# Altium PCB Arduino NG Ahuratus-PCB.PcbDoc (part 4 of 6)
Units mm, origin at the board's own origin, x right, y up, seen from the top; angles counter-clockwise.
Board outline 69 x 53.5 mm, 2 copper layers (Top Layer, Bottom Layer); 37 components, 49 nets, 193 pads, 40 vias.
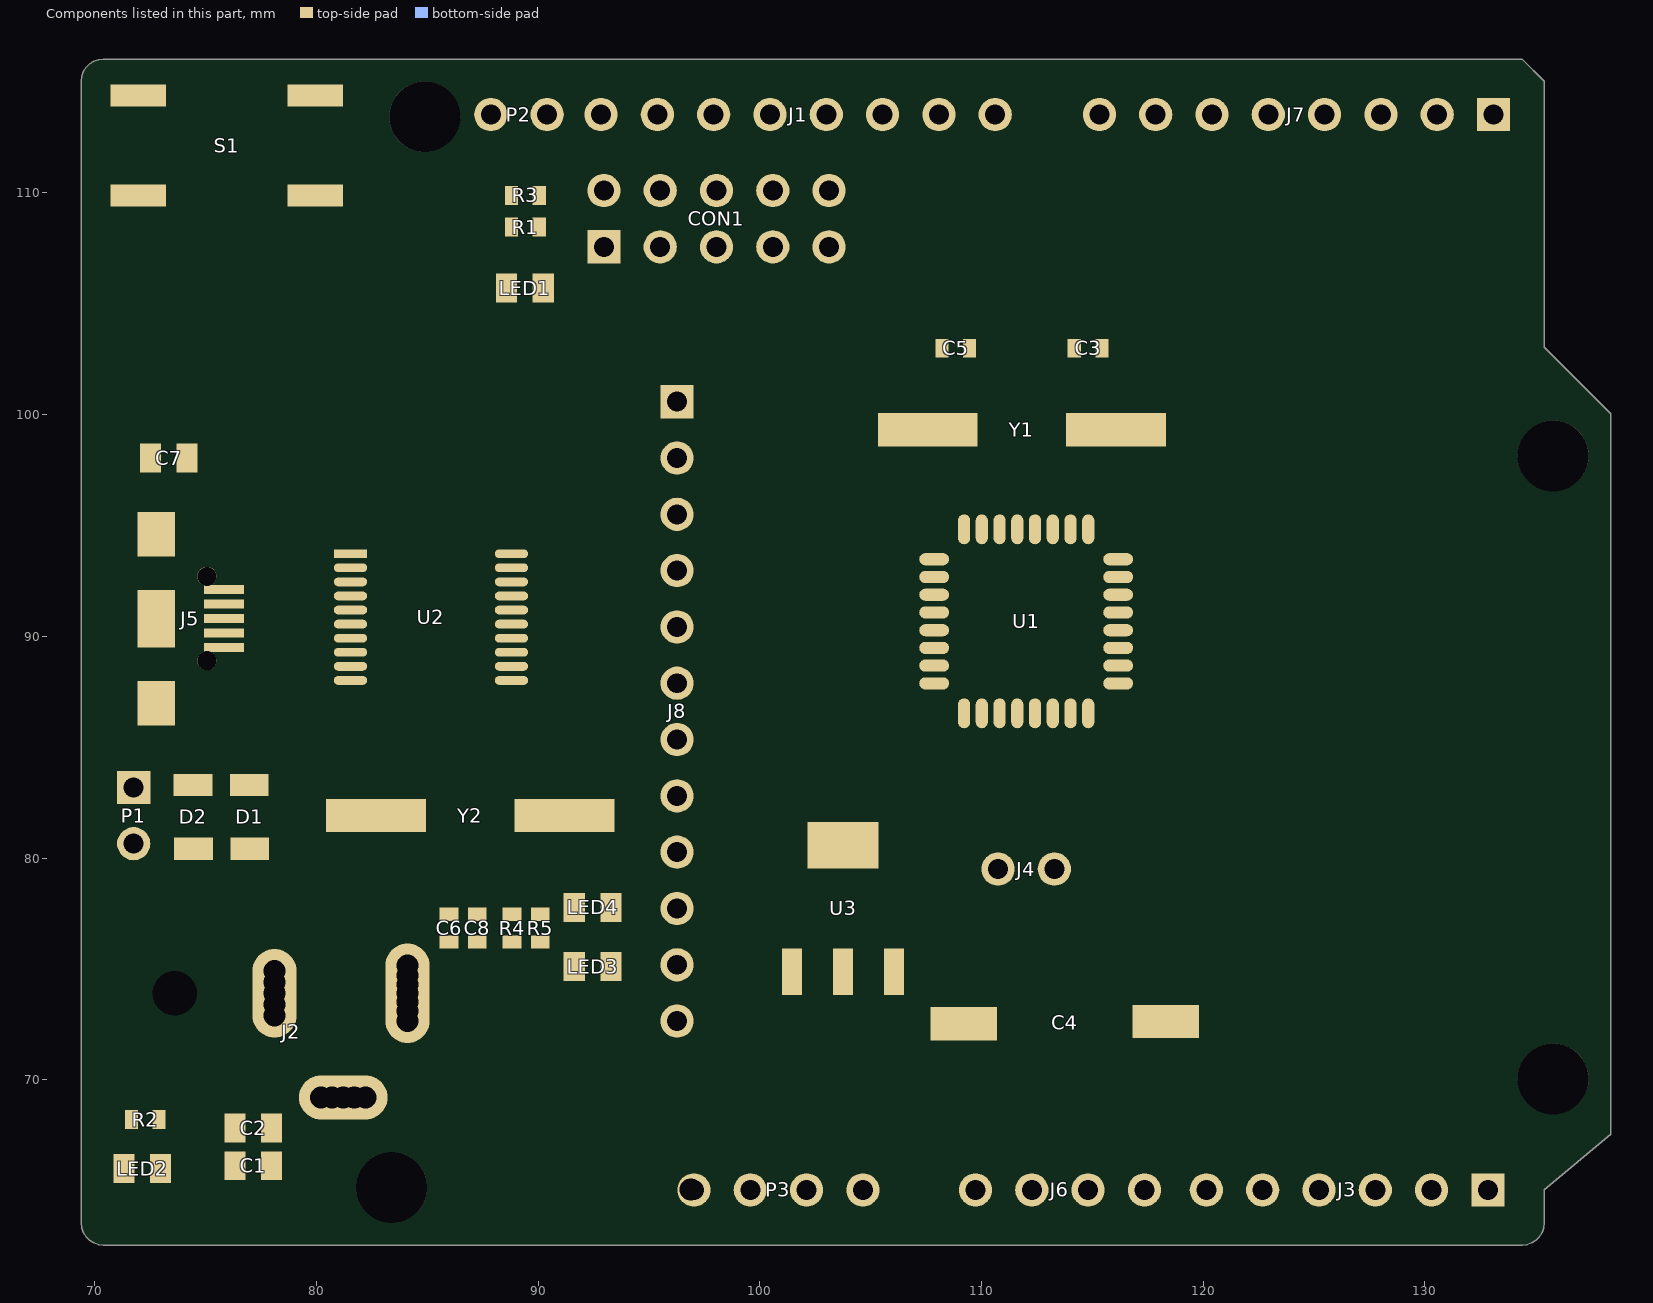
[diagram p4: the components of this part, seen from the top]

## Via types
v1: diameter 1.27, hole 0.711, Top Layer to Bottom Layer, 40 vias

## Nets (pads, with @x,y where several pads share a name; then routed paths per layer and width w, separated by ;. In a path a pad name is that pad's centre, name@x,y a point inside that pad or via, vN(x,y) a via of type N, cw(c..) or ccw(c..) an arc to the next point about the centre after c; other vN are vias at no path point) (continued)
copper on no net: (continued)
  Bottom Layer w0.025: 83.185,79.629 83.845,79.629 ; 83.185,80.594 83.414,80.594 ; 83.185,80.62 83.414,80.62 ; 83.185,80.645 83.388,80.645 ; 83.185,80.67 83.388,80.67 ; 83.185,81.077 83.388,81.077 ; 83.185,81.102 83.388,81.102 ; 83.185,81.128 83.414,81.128 ; 83.185,81.153 83.414,81.153 ; 83.185,82.118 83.566,82.118 ; 83.185,82.55 83.439,82.55 ; 83.185,82.575 83.439,82.575 ; 83.185,83.033 83.439,83.033 ; 83.185,84.404 83.566,84.404 ; 83.185,84.43 83.566,84.43 ; 83.185,84.455 83.566,84.455 ; 83.185,84.48 83.566,84.48 ; 83.185,84.506 83.566,84.506 ; 83.185,84.531 83.591,84.531 ; 83.185,84.557 83.591,84.557 ; 83.185,84.582 83.591,84.582 ; 83.185,85.827 83.414,85.827 ; 83.185,87.224 83.947,87.224 ; 83.185,87.249 83.845,87.249 ; 83.21,77.47 83.617,77.47 ; 83.21,80.518 83.439,80.518 ; 83.21,80.543 83.439,80.543 ; 83.21,80.569 83.414,80.569 ; 83.21,81.178 83.439,81.178 ; 83.21,81.204 83.464,81.204 ; 83.21,81.737 83.642,81.737 ; 83.21,82.525 83.464,82.525 ; 83.21,84.607 83.591,84.607 ; 83.21,84.633 83.591,84.633 ; 83.21,84.658 83.617,84.658 ; 83.21,84.684 83.617,84.684 ; 83.21,84.709 83.617,84.709 ; 83.21,84.734 83.617,84.734 ; 83.21,85.776 83.439,85.776 ; 83.21,85.801 83.439,85.801 ; 83.21,87.274 83.769,87.274 ; 83.236,79.07 83.769,79.07 ; 83.236,79.654 83.871,79.654 ; 83.236,80.467 83.464,80.467 ; 83.236,80.493 83.439,80.493 ; 83.236,81.229 83.464,81.229 ; 83.236,81.255 83.49,81.255 ; 83.236,81.763 83.718,81.763 ; 83.236,82.144 83.566,82.144 ; 83.236,82.499 83.464,82.499 ; 83.236,83.007 83.388,83.007 ; 83.236,84.76 83.642,84.76 ; 83.236,84.785 83.642,84.785 ; 83.236,84.811 83.642,84.811 ; 83.236,84.836 83.642,84.836 ; 83.236,84.861 83.668,84.861 ; 83.236,84.887 83.439,84.887 ; 83.236,85.725 83.464,85.725 ; 83.236,85.75 83.464,85.75 ; 83.236,87.3 83.668,87.3 ; 83.261,77.495 83.642,77.495 ; 83.261,80.34 83.464,80.34 ; 83.261,80.366 83.464,80.366 ; 83.261,80.391 83.464,80.391 ; 83.261,80.416 83.464,80.416 ; 83.261,80.442 83.464,80.442 ; 83.261,81.28 83.541,81.28 ; 83.261,82.448 83.49,82.448 ; 83.261,82.474 83.49,82.474 ; 83.261,84.912 83.668,84.912 ; 83.261,84.938 83.668,84.938 ; 83.261,84.963 83.693,84.963 ; 83.261,84.988 83.464,84.988 ; 83.261,85.014 83.464,85.014 ; 83.261,85.039 83.464,85.039 ; 83.261,85.674 83.49,85.674 ; 83.261,85.7 83.464,85.7 ; 83.261,86.436 85.395,86.436 ; 83.261,87.325 83.566,87.325 ; 83.287,79.045 83.769,79.045 ; 83.287,81.305 83.566,81.305 ; 83.287,81.788 83.795,81.788 ; 83.287,82.169 83.541,82.169 ; 83.287,82.398 83.515,82.398 ; 83.287,82.423 83.515,82.423 ; 83.287,85.065 83.49,85.065 ; 83.287,85.09 83.49,85.09 ; 83.287,85.115 83.49,85.115 ; 83.287,85.141 83.49,85.141 ; 83.287,85.166 83.515,85.166 ; 83.287,85.573 83.515,85.573 ; 83.287,85.598 83.49,85.598 ; 83.287,85.623 83.49,85.623 ; 83.287,85.649 83.49,85.649 ; 83.287,87.351 83.439,87.351 ; 83.312,77.521 83.668,77.521 ; 83.312,79.019 83.795,79.019 ; 83.312,79.68 83.871,79.68 ; 83.312,81.331 83.591,81.331 ; 83.312,81.356 83.642,81.356 ; 83.312,82.321 83.541,82.321 ; 83.312,82.347 83.515,82.347 ; 83.312,82.372 83.515,82.372 ; 83.312,85.192 83.515,85.192 ; 83.312,85.217 83.515,85.217 ; 83.312,85.242 83.515,85.242 ; 83.312,85.268 83.515,85.268 ; 83.312,85.293 83.515,85.293 ; 83.312,85.471 83.515,85.471 ; 83.312,85.496 83.515,85.496 ; 83.312,85.522 83.515,85.522 ; 83.312,85.547 83.515,85.547 ; 83.337,78.994 83.795,78.994 ; 83.337,81.382 83.718,81.382 ; 83.337,81.813 83.998,81.813 ; 83.337,82.194 83.541,82.194 ; 83.337,82.22 83.541,82.22 ; 83.337,82.245 83.541,82.245 ; 83.337,82.271 83.541,82.271 ; 83.337,82.296 83.541,82.296 ; 83.337,83.21 83.82,83.21 ; 83.337,85.319 83.515,85.319 ; 83.337,85.344 83.541,85.344 ; 83.337,85.369 83.541,85.369 ; 83.337,85.395 83.541,85.395 ; 83.337,85.42 83.541,85.42 ; 83.337,85.446 83.515,85.446 ; 83.363,77.546 83.693,77.546 ; 83.363,78.969 83.795,78.969 ; 83.363,79.705 83.896,79.705 ; 83.363,81.407 83.769,81.407 ; 83.363,81.839 85.014,81.839 ; 83.363,83.236 83.845,83.236 ; 83.388,78.943 83.795,78.943 ; 83.388,81.432 83.845,81.432 ; 83.388,83.261 83.845,83.261 ; 83.414,77.572 83.718,77.572 ; 83.414,78.918 83.795,78.918 ; 83.414,79.731 83.922,79.731 ; 83.414,83.287 83.871,83.287 ; 83.414,83.312 83.896,83.312 ; 83.414,86.411 85.42,86.411 ; 83.439,77.597 83.718,77.597 ; 83.439,78.892 83.795,78.892 ; 83.439,81.458 83.972,81.458 ; 83.439,81.864 84.988,81.864 ; 83.439,83.337 83.922,83.337 ; 83.464,77.622 83.744,77.622 ; 83.464,78.867 83.82,78.867 ; 83.464,79.756 83.947,79.756 ; 83.464,81.483 84.811,81.483 ; 83.464,82.931 84.353,82.931 ; 83.464,82.956 84.404,82.956 ; 83.464,82.982 84.455,82.982 ; 83.464,83.007 83.668,83.007 ; 83.464,83.033 83.668,83.033 ; 83.464,83.363 83.947,83.363 ; 83.464,84.887 83.668,84.887 ; 83.49,77.648 83.769,77.648 ; 83.49,78.816 83.845,78.816 ; 83.49,78.842 83.82,78.842 ; 83.49,81.89 84.938,81.89 ; 83.49,82.88 84.277,82.88 ; 83.49,82.906 84.303,82.906 ; 83.49,83.058 83.693,83.058 ; 83.49,83.388 83.947,83.388 ; 83.49,83.414 83.972,83.414 ; 83.49,84.988 83.693,84.988 ; 83.49,85.014 83.693,85.014 ; 83.49,85.039 83.718,85.039 ; 83.515,77.673 83.795,77.673 ; 83.515,78.765 84.328,78.765 ; 83.515,78.791 84.328,78.791 ; 83.515,79.781 83.972,79.781 ; 83.515,81.509 84.709,81.509 ; 83.515,82.855 84.226,82.855 ; 83.515,83.439 83.998,83.439 ; 83.515,85.065 83.718,85.065 ; 83.515,85.09 83.718,85.09 ; 83.515,85.115 83.744,85.115 ; 83.515,86.385 85.471,86.385 ; 83.541,77.699 83.795,77.699 ; 83.541,78.715 84.328,78.715 ; 83.541,78.74 84.328,78.74 ; 83.541,82.829 84.176,82.829 ; 83.541,83.464 84.023,83.464 ; 83.541,85.141 83.744,85.141 ; 83.541,85.166 83.769,85.166 ; 83.541,85.192 83.769,85.192 ; 83.566,77.724 83.82,77.724 ; 83.566,78.664 84.328,78.664 ; 83.566,78.689 84.328,78.689 ; 83.566,79.807 83.972,79.807 ; 83.566,80.797 84.023,80.797 ; 83.566,80.823 84.049,80.823 ; 83.566,80.848 84.074,80.848 ; 83.566,80.874 84.099,80.874 ; 83.566,80.899 83.795,80.899 ; 83.566,80.924 83.795,80.924 ; 83.566,80.95 83.769,80.95 ; 83.566,81.534 84.658,81.534 ; 83.566,81.915 84.861,81.915 ; 83.566,83.49 84.023,83.49 ; 83.566,83.515 84.049,83.515 ; 83.566,85.217 83.795,85.217 ; 83.566,85.242 83.795,85.242 ; 83.591,77.749 83.845,77.749 ; 83.591,78.562 84.328,78.562 ; 83.591,78.588 84.328,78.588 ; 83.591,78.613 84.328,78.613 ; 83.591,78.638 84.328,78.638 ; 83.591,80.67 83.795,80.67 ; 83.591,80.696 83.795,80.696 ; 83.591,80.721 83.769,80.721 ; 83.591,80.747 83.769,80.747 ; 83.591,80.772 83.998,80.772 ; 83.591,80.975 83.769,80.975 ; 83.591,81.001 83.769,81.001 ; 83.591,81.026 83.795,81.026 ; 83.591,81.051 83.795,81.051 ; 83.591,81.077 83.795,81.077 ; 83.591,83.541 84.074,83.541 ; 83.591,85.268 83.82,85.268 ; 83.591,85.293 83.82,85.293 ; 83.617,77.775 83.845,77.775 ; 83.617,78.511 83.744,78.511 ; 83.617,78.537 84.328,78.537 ; 83.617,79.832 83.998,79.832 ; 83.617,80.62 84.074,80.62 ; 83.617,80.645 83.82,80.645 ; 83.617,81.102 83.82,81.102 ; 83.617,81.128 84.074,81.128 ; 83.617,82.575 85.344,82.575 ; 83.617,82.601 85.192,82.601 ; 83.617,82.626 85.217,82.626 ; 83.617,82.652 85.344,82.652 ; 83.617,82.677 83.871,82.677 ; 83.617,82.702 83.922,82.702 ; 83.617,82.804 84.125,82.804 ; 83.617,83.566 84.099,83.566 ; 83.617,85.319 83.845,85.319 ; 83.617,85.344 83.871,85.344 ; 83.617,86.36 85.496,86.36 ; 83.642,77.8 83.871,77.8 ; 83.642,77.826 83.896,77.826 ; 83.642,80.569 84.049,80.569 ; 83.642,80.594 84.074,80.594 ; 83.642,81.153 84.074,81.153 ; 83.642,81.178 84.049,81.178 ; 83.642,81.559 84.582,81.559 ; 83.642,81.94 84.76,81.94 ; 83.642,82.55 85.42,82.55 ; 83.642,82.728 83.972,82.728 ; 83.642,82.753 84.023,82.753 ; 83.642,83.591 84.099,83.591 ; 83.642,83.617 84.125,83.617 ; 83.642,85.369 83.871,85.369 ; 83.642,85.395 83.896,85.395 ; 83.668,77.851 83.896,77.851 ; 83.668,79.858 84.023,79.858 ; 83.668,80.543 84.049,80.543 ; 83.668,81.204 84.023,81.204 ; 83.668,82.525 85.471,82.525 ; 83.668,82.779 84.074,82.779 ; 83.668,83.642 84.15,83.642 ; 83.668,85.42 83.922,85.42 ; 83.693,77.876 83.922,77.876 ; 83.693,77.902 83.922,77.902 ; 83.693,80.518 84.023,80.518 ; 83.693,81.585 84.506,81.585 ; 83.693,82.194 84.633,82.194 ; 83.693,82.22 84.48,82.22 ; 83.693,82.245 83.896,82.245 ; 83.693,82.271 83.922,82.271 ; 83.693,82.296 83.972,82.296 ; 83.693,82.499 85.522,82.499 ; 83.693,83.668 84.15,83.668 ; 83.693,85.446 83.947,85.446 ; 83.693,85.471 83.972,85.471 ; 83.718,77.927 83.922,77.927 ; 83.718,77.953 83.947,77.953 ; 83.718,77.978 83.947,77.978 ; 83.718,79.883 84.023,79.883 ; 83.718,81.229 83.998,81.229 ; 83.718,82.144 84.836,82.144 ; 83.718,82.169 84.76,82.169 ; 83.718,82.321 84.074,82.321 ; 83.718,82.347 84.252,82.347 ; 83.718,83.007 84.506,83.007 ; 83.718,83.693 84.176,83.693 ; 83.718,83.718 84.201,83.718 ; 83.718,85.496 83.998,85.496 ; 83.718,86.335 85.522,86.335 ; 83.744,78.003 83.947,78.003 ; 83.744,78.029 83.972,78.029 ; 83.744,78.054 83.972,78.054 ; 83.744,79.908 84.049,79.908 ; 83.744,80.493 83.972,80.493 ; 83.744,81.966 84.684,81.966 ; 83.744,82.118 84.912,82.118 ; 83.744,82.372 84.404,82.372 ; 83.744,83.744 84.226,83.744 ; 83.744,85.522 84.049,85.522 ; 83.769,78.08 83.972,78.08 ; 83.769,78.105 83.972,78.105 ; 83.769,78.13 83.972,78.13 ; 83.769,81.61 84.404,81.61 ; 83.769,82.093 85.014,82.093 ; 83.769,82.398 84.658,82.398 ; 83.769,83.033 84.531,83.033 ; 83.769,83.769 84.226,83.769 ; 83.769,85.547 84.125,85.547 ; 83.795,78.156 83.998,78.156 ; 83.795,78.181 83.998,78.181 ; 83.795,78.207 83.998,78.207 ; 83.795,78.232 83.998,78.232 ; 83.795,78.257 83.998,78.257 ; 83.795,78.435 84.252,78.435 ; 83.795,78.461 84.252,78.461 ; 83.795,78.486 84.328,78.486 ; 83.795,78.511 84.328,78.511 ; 83.795,79.934 84.074,79.934 ; 83.795,81.255 83.922,81.255 ; 83.795,82.423 84.912,82.423 ; 83.795,83.795 84.252,83.795 ; 83.795,83.82 84.277,83.82 ; 83.795,85.573 84.607,85.573 ; 83.795,85.598 84.582,85.598 ; 83.795,86.309 85.547,86.309 ; 83.82,78.283 83.998,78.283 ; 83.82,78.308 84.023,78.308 ; 83.82,78.334 84.023,78.334 ; 83.82,78.359 84.023,78.359 ; 83.82,78.384 84.277,78.384 ; 83.82,78.41 84.252,78.41 ; 83.82,79.959 84.074,79.959 ; 83.82,80.747 83.947,80.747 ; 83.82,82.067 85.141,82.067 ; 83.82,82.474 83.947,82.474 ; 83.82,83.058 84.582,83.058 ; 83.82,83.845 84.277,83.845 ; 83.845,83.083 84.633,83.083 ; 83.845,83.871 84.303,83.871 ; 83.845,85.623 84.557,85.623 ; 83.871,78.816 84.328,78.816 ; 83.871,79.985 84.099,79.985 ; 83.871,82.448 85.573,82.448 ; 83.871,83.896 84.328,83.896 ; 83.871,85.649 84.531,85.649 ; 83.871,86.284 85.573,86.284 ; 83.896,78.842 84.328,78.842 ; 83.896,78.867 84.328,78.867 ; 83.896,80.01 84.099,80.01 ; 83.896,80.645 84.099,80.645 ; 83.896,80.899 84.099,80.899 ; 83.896,81.102 84.099,81.102 ; 83.896,81.636 84.252,81.636 ; 83.896,83.109 84.658,83.109 ; 83.896,83.922 84.353,83.922 ; 83.896,83.947 84.353,83.947 ; 83.922,78.892 84.328,78.892 ; 83.922,78.918 84.328,78.918 ; 83.922,80.035 84.125,80.035 ; 83.922,80.67 84.099,80.67 ; 83.922,80.696 84.023,80.696 ; 83.922,80.924 84.099,80.924 ; 83.922,80.95 84.099,80.95 ; 83.922,80.975 84.125,80.975 ; 83.922,81.001 84.125,81.001 ; 83.922,81.026 84.125,81.026 ; 83.922,81.051 84.099,81.051 ; 83.922,81.077 84.099,81.077 ; 83.922,81.991 84.531,81.991 ; 83.922,83.972 84.379,83.972 ; 83.922,85.674 84.48,85.674 ; 83.947,78.943 84.328,78.943 ; 83.947,78.969 84.328,78.969 ; 83.947,80.061 84.125,80.061 ; 83.947,83.134 84.709,83.134 ; 83.947,83.998 84.404,83.998 ; 83.947,86.258 85.598,86.258 ; 83.972,78.994 84.328,78.994 ; 83.972,79.019 84.328,79.019 ; 83.972,79.045 84.328,79.045 ; 83.972,80.086 84.15,80.086 ; 83.972,82.474 85.547,82.474 ; 83.972,84.023 84.404,84.023 ; 83.972,84.049 84.43,84.049 ; 83.972,85.7 84.43,85.7 ; 83.998,79.07 84.353,79.07 ; 83.998,79.096 84.353,79.096 ; 83.998,79.121 84.353,79.121 ; 83.998,79.146 84.353,79.146 ; 83.998,80.112 84.15,80.112 ; 83.998,83.16 84.734,83.16 ; 83.998,84.074 84.455,84.074 ; 84.023,79.172 84.379,79.172 ; 84.023,79.197 84.379,79.197 ; 84.023,79.223 84.379,79.223 ; 84.023,79.248 84.404,79.248 ; 84.023,80.137 84.15,80.137 ; 84.023,83.185 84.785,83.185 ; 84.023,84.099 84.48,84.099 ; 84.023,84.125 84.506,84.125 ; 84.023,86.233 85.623,86.233 ; 84.049,78.359 84.277,78.359 ; 84.049,79.273 84.404,79.273 ; 84.049,79.299 84.404,79.299 ; 84.049,79.324 84.43,79.324 ; 84.049,80.162 84.125,80.162 ; 84.049,84.15 84.506,84.15 ; 84.049,85.725 84.353,85.725 ; 84.074,78.334 84.303,78.334 ; 84.074,79.35 84.455,79.35 ; 84.074,79.375 84.455,79.375 ; 84.074,83.21 84.811,83.21 ; 84.074,84.176 84.531,84.176 ; 84.074,86.208 85.649,86.208 ; 84.099,78.283 84.328,78.283 ; 84.099,78.308 84.303,78.308 ; 84.099,79.4 84.455,79.4 ; 84.099,79.426 84.48,79.426 ; 84.099,79.451 84.531,79.451 ; 84.099,82.677 85.42,82.677 ; 84.099,84.201 84.557,84.201 ; 84.099,84.226 84.582,84.226 ; 84.125,78.257 84.353,78.257 ; 84.125,79.477 84.531,79.477 ; 84.125,79.502 84.557,79.502 ; 84.125,83.236 84.861,83.236 ; 84.125,84.252 84.607,84.252 ; 84.125,86.182 85.674,86.182 ; 84.15,78.207 84.379,78.207 ; 84.15,78.232 84.353,78.232 ; 84.15,79.527 84.607,79.527 ; 84.15,81.458 85.166,81.458 ; 84.15,84.277 84.633,84.277 ; 84.15,84.303 84.658,84.303 ; 84.176,78.181 84.404,78.181 ; 84.176,79.553 84.633,79.553 ; 84.176,79.578 84.658,79.578 ; 84.176,83.261 84.912,83.261 ; 84.176,84.328 84.684,84.328 ; 84.201,78.156 84.43,78.156 ; 84.201,79.604 84.709,79.604 ; 84.201,84.353 84.709,84.353 ; 84.201,84.379 84.734,84.379 ; 84.201,86.157 85.7,86.157 ; 84.226,78.105 84.48,78.105 ; 84.226,78.13 84.455,78.13 ; 84.226,79.629 84.734,79.629 ; 84.226,83.287 84.938,83.287 ; 84.226,84.404 84.76,84.404 ; 84.252,78.08 84.506,78.08 ; 84.252,79.654 84.785,79.654 ; 84.252,84.43 84.811,84.43 ; 84.252,86.131 85.725,86.131 ; 84.277,78.054 84.557,78.054 ; 84.277,79.68 84.861,79.68 ; 84.277,80.493 84.455,80.493 ; 84.277,80.518 84.455,80.518 ; 84.277,80.543 84.455,80.543 ; 84.277,80.569 84.455,80.569 ; 84.277,80.594 84.455,80.594 ; 84.277,80.62 84.455,80.62 ; 84.277,80.645 84.455,80.645 ; 84.277,80.67 84.455,80.67 ; 84.277,80.696 84.455,80.696 ; 84.277,80.721 84.455,80.721 ; 84.277,80.747 84.455,80.747 ; 84.277,80.772 84.455,80.772 ; 84.277,80.797 84.455,80.797 ; 84.277,80.823 84.455,80.823 ; 84.277,80.848 84.455,80.848 ; 84.277,80.874 84.455,80.874 ; 84.277,80.899 84.455,80.899 ; 84.277,80.924 84.455,80.924 ; 84.277,80.95 84.455,80.95 ; 84.277,80.975 84.455,80.975 ; 84.277,81.001 84.633,81.001 ; 84.277,81.026 84.633,81.026 ; 84.277,81.051 84.633,81.051 ; 84.277,81.077 84.607,81.077 ; 84.277,81.102 84.582,81.102 ; 84.277,81.128 84.531,81.128 ; 84.277,81.153 84.506,81.153 ; 84.277,81.178 84.48,81.178 ; 84.277,81.204 84.455,81.204 ; 84.277,81.229 84.43,81.229 ; 84.277,81.255 84.43,81.255 ; 84.277,83.312 84.988,83.312 ; 84.277,84.455 84.836,84.455 ; 84.277,84.48 84.506,84.48 ; 84.303,78.029 84.582,78.029 ; 84.303,79.705 84.938,79.705 ; 84.303,84.506 84.531,84.506 ; 84.303,84.531 84.557,84.531 ; 84.303,85.547 84.633,85.547 ; 84.303,86.106 85.75,86.106 ; 84.328,78.003 84.633,78.003 ; 84.328,79.731 86.081,79.731 ; 84.328,81.432 85.166,81.432 ; 84.328,82.702 85.496,82.702 ; 84.328,83.337 85.039,83.337 ; 84.328,84.557 84.557,84.557 ; 84.353,77.978 84.684,77.978 ; 84.353,79.756 86.081,79.756 ; 84.353,83.363 85.09,83.363 ; 84.353,84.582 84.582,84.582 ; 84.353,84.607 84.582,84.607 ; 84.353,85.522 84.658,85.522 ; 84.353,86.081 85.776,86.081 ; 84.379,77.953 84.734,77.953 ; 84.379,79.781 86.055,79.781 ; 84.379,84.633 84.607,84.633 ; 84.379,84.658 84.607,84.658 ; 84.404,79.807 86.03,79.807 ; 84.404,83.388 85.141,83.388 ; 84.404,84.684 84.633,84.684 ; 84.404,84.709 84.633,84.709 ; 84.404,85.496 84.658,85.496 ; 84.404,86.055 85.776,86.055 ; 84.43,77.927 84.811,77.927 ; 84.43,79.832 86.004,79.832 ; 84.43,81.407 85.141,81.407 ; 84.43,84.734 84.658,84.734 ; 84.43,84.76 84.658,84.76 ; 84.43,85.471 84.684,85.471 ; 84.43,86.03 85.801,86.03 ; 84.455,77.902 84.887,77.902 ; 84.455,79.858 86.004,79.858 ; 84.455,81.813 85.065,81.813 ; 84.455,82.042 85.598,82.042 ; 84.455,83.414 85.217,83.414 ; 84.455,84.785 84.684,84.785 ; 84.455,84.811 84.684,84.811 ; 84.455,85.446 84.684,85.446 ; 84.48,79.883 85.979,79.883 ; 84.48,80.975 84.633,80.975 ; 84.48,84.836 84.684,84.836 ; 84.48,84.861 84.709,84.861 ; 84.48,85.395 84.709,85.395 ; 84.48,85.42 84.684,85.42 ; 84.48,86.004 85.827,86.004 ; 84.506,77.876 85.09,77.876 ; 84.506,79.908 85.954,79.908 ; 84.506,81.382 85.141,81.382 ; 84.506,83.439 85.7,83.439 ; 84.506,84.887 84.709,84.887 ; 84.506,84.912 84.709,84.912 ; 84.506,84.938 84.734,84.938 ; 84.506,85.319 84.734,85.319 ; 84.506,85.344 84.709,85.344 ; 84.506,85.369 84.709,85.369 ; 84.531,77.851 85.674,77.851 ; 84.531,79.934 85.954,79.934 ; 84.531,80.95 84.633,80.95 ; 84.531,82.728 85.547,82.728 ; 84.531,83.464 85.674,83.464 ; 84.531,84.48 84.887,84.48 ; 84.531,84.963 84.734,84.963 ; 84.531,84.988 84.734,84.988 ; 84.531,85.014 84.734,85.014 ; 84.531,85.039 84.734,85.039 ; 84.531,85.065 84.734,85.065 ; 84.531,85.217 84.734,85.217 ; 84.531,85.242 84.734,85.242 ; 84.531,85.268 84.734,85.268 ; 84.531,85.293 84.734,85.293 ; 84.531,85.979 85.852,85.979 ; 84.557,85.09 84.734,85.09 ; 84.557,85.115 84.734,85.115 ; 84.557,85.141 84.734,85.141 ; 84.557,85.166 84.734,85.166 ; 84.557,85.192 84.734,85.192 ; 84.557,85.954 85.877,85.954 ; 84.582,77.826 85.649,77.826 ; 84.582,79.959 85.928,79.959 ; 84.582,80.924 84.633,80.924 ; 84.582,81.356 85.115,81.356 ; 84.582,83.49 85.649,83.49 ; 84.582,84.506 84.963,84.506 ; 84.607,79.985 85.928,79.985 ; 84.607,81.788 85.09,81.788 ; 84.607,82.017 85.573,82.017 ; 84.607,84.531 85.42,84.531 ; 84.607,85.928 85.877,85.928 ; 84.633,77.8 85.598,77.8 ; 84.633,80.01 85.573,80.01 ; 84.633,83.515 85.623,83.515 ; 84.633,84.557 85.395,84.557 ; 84.633,85.903 85.877,85.903 ; 84.658,80.035 85.547,80.035 ; 84.658,81.331 85.065,81.331 ; 84.658,83.541 85.573,83.541 ; 84.684,77.775 85.547,77.775 ; 84.684,80.061 85.522,80.061 ; 84.684,81.991 85.547,81.991 ; 84.684,84.582 85.369,84.582 ; 84.684,85.877 85.877,85.877 ; 84.709,80.086 85.496,80.086 ; 84.709,81.763 85.115,81.763 ; 84.709,83.566 85.547,83.566 ; 84.709,84.607 85.319,84.607 ; 84.709,85.852 85.852,85.852 ; 84.734,80.112 85.496,80.112 ; 84.734,81.305 84.988,81.305 ; 84.734,85.827 85.852,85.827 ; 84.76,77.749 85.471,77.749 ; 84.76,82.753 85.573,82.753 ; 84.76,83.591 85.09,83.591 ; 84.76,84.633 85.293,84.633 ; 84.785,80.137 85.471,80.137 ; 84.785,81.737 85.115,81.737 ; 84.785,81.966 85.522,81.966 ; 84.785,83.617 85.141,83.617 ; 84.785,85.801 85.827,85.801 ; 84.811,80.162 85.471,80.162 ; 84.811,84.658 85.242,84.658 ; 84.811,85.776 85.827,85.776 ; 84.836,77.724 85.395,77.724 ; 84.836,80.188 85.446,80.188 ; 84.836,83.642 85.166,83.642 ; 84.836,85.75 85.801,85.75 ; 84.836,86.462 85.369,86.462 ; 84.861,80.213 85.446,80.213 ; 84.861,80.239 85.446,80.239 ; 84.861,81.712 85.141,81.712 ; 84.861,81.94 85.471,81.94 ; 84.861,83.668 85.192,83.668 ; 84.861,85.725 85.801,85.725 ; 84.887,80.264 85.446,80.264 ; 84.912,80.289 85.446,80.289 ; 84.912,81.686 85.166,81.686 ; 84.912,83.693 85.242,83.693 ; 84.912,84.684 85.166,84.684 ; 84.912,85.7 85.801,85.7 ; 84.912,86.487 85.344,86.487 ; 84.938,80.315 85.446,80.315 ; 84.938,80.34 85.42,80.34 ; 84.938,81.483 85.192,81.483 ; 84.938,81.661 85.166,81.661 ; 84.938,83.718 85.268,83.718 ; 84.938,85.674 85.801,85.674 ; 84.938,86.512 85.293,86.512 ; 84.963,77.699 85.242,77.699 ; 84.963,80.366 85.42,80.366 ; 84.963,81.61 85.166,81.61 ; 84.963,81.636 85.166,81.636 ; 84.963,81.915 85.395,81.915 ; 84.963,85.649 85.776,85.649 ; 84.988,80.391 85.42,80.391 ; 84.988,80.416 85.42,80.416 ; 84.988,81.509 85.192,81.509 ; 84.988,81.534 85.192,81.534 ; 84.988,81.559 85.192,81.559 ; 84.988,81.585 85.192,81.585 ; 84.988,82.779 85.598,82.779 ; 84.988,83.744 85.293,83.744 ; 84.988,85.623 85.776,85.623 ; 84.988,86.538 85.268,86.538 ; 85.014,80.442 85.42,80.442 ; 85.014,80.467 85.42,80.467 ; 85.014,83.769 85.319,83.769 ; 85.014,85.598 85.776,85.598 ; 85.014,86.563 85.242,86.563 ; 85.039,80.493 85.42,80.493 ; 85.039,83.795 85.344,83.795 ; 85.039,85.573 85.776,85.573 ; 85.065,80.518 85.42,80.518 ; 85.065,80.543 85.42,80.543 ; 85.065,81.89 85.319,81.89 ; 85.065,83.82 85.344,83.82 ; 85.065,85.547 85.776,85.547 ; 85.065,86.589 85.192,86.589 ; 85.09,80.569 85.42,80.569 ; 85.09,80.594 85.42,80.594 ; 85.09,84.506 85.446,84.506 ; 85.09,85.522 85.776,85.522 ; 85.09,86.614 85.166,86.614 ; 85.115,80.62 85.42,80.62 ; 85.115,80.645 85.42,80.645 ; 85.115,83.845 85.369,83.845 ; 85.115,85.496 85.776,85.496 ; 85.141,77.876 85.725,77.876 ; 85.141,80.67 85.42,80.67 ; 85.141,83.871 85.395,83.871 ; 85.141,85.471 85.801,85.471 ; 85.166,80.696 85.42,80.696 ; 85.166,80.721 85.42,80.721 ; 85.166,82.423 85.573,82.423 ; 85.166,82.804 85.649,82.804 ; 85.166,83.591 85.471,83.591 ; 85.166,83.896 85.395,83.896 ; 85.166,84.48 85.446,84.48 ; 85.166,85.42 85.852,85.42 ; 85.166,85.446 85.827,85.446 ; 85.192,80.747 85.42,80.747 ; 85.192,80.772 85.42,80.772 ; 85.192,83.922 85.42,83.922 ; 85.192,83.947 85.446,83.947 ; 85.192,84.455 85.471,84.455 ; 85.192,85.395 85.852,85.395 ; 85.217,79.705 86.106,79.705 ; 85.217,80.797 85.42,80.797 ; 85.217,83.972 85.446,83.972 ; 85.217,85.369 85.877,85.369 ; 85.242,80.823 85.42,80.823 ; 85.242,80.848 85.42,80.848 ; 85.242,82.067 85.623,82.067 ; 85.242,83.998 85.446,83.998 ; 85.242,84.023 85.471,84.023 ; 85.242,84.43 85.471,84.43 ; 85.242,85.344 85.903,85.344 ; 85.268,80.874 85.42,80.874 ; 85.268,80.899 85.42,80.899 ; 85.268,82.829 85.674,82.829 ; 85.268,84.049 85.471,84.049 ; 85.268,84.074 85.496,84.074 ; 85.268,84.099 85.496,84.099 ; 85.268,84.379 85.496,84.379 ; 85.268,84.404 85.496,84.404 ; 85.268,85.319 85.928,85.319 ; 85.293,80.924 85.42,80.924 ; 85.293,82.398 85.598,82.398 ; 85.293,84.125 85.496,84.125 ; 85.293,84.15 85.496,84.15 ; 85.293,84.176 85.496,84.176 ; 85.293,84.201 85.496,84.201 ; 85.293,84.303 85.496,84.303 ; 85.293,84.328 85.496,84.328 ; 85.293,84.353 85.496,84.353 ; 85.293,85.268 85.954,85.268 ; 85.293,85.293 85.928,85.293 ; 85.319,79.68 86.131,79.68 ; 85.319,80.95 85.42,80.95 ; 85.319,82.093 85.623,82.093 ; 85.319,84.226 85.522,84.226 ; 85.319,84.252 85.522,84.252 ; 85.319,84.277 85.522,84.277 ; 85.319,85.242 85.979,85.242 ; 85.344,77.902 85.75,77.902 ; 85.344,80.975 85.42,80.975 ; 85.344,82.372 85.623,82.372 ; 85.344,85.217 85.979,85.217 ; 85.369,79.654 86.157,79.654 ; 85.369,82.855 85.7,82.855 ; 85.369,83.414 85.725,83.414 ; 85.369,85.192 86.004,85.192 ; 85.395,82.118 85.649,82.118 ; 85.395,82.347 85.623,82.347 ; 85.395,85.166 86.03,85.166 ; 85.42,77.927 85.801,77.927 ; 85.42,79.629 86.208,79.629 ; 85.42,82.144 85.649,82.144 ; 85.42,82.296 85.649,82.296 ; 85.42,82.321 85.623,82.321 ; 85.42,82.88 85.725,82.88 ; 85.42,85.141 86.055,85.141 ; 85.446,82.169 85.649,82.169 ; 85.446,82.194 85.649,82.194 ; 85.446,82.22 85.649,82.22 ; 85.446,82.245 85.649,82.245 ; 85.446,82.271 85.649,82.271 ; 85.446,82.906 85.725,82.906 ; 85.446,85.09 86.081,85.09 ; 85.446,85.115 86.055,85.115 ; 85.471,79.604 86.233,79.604 ; 85.471,83.388 85.75,83.388 ; 85.471,85.065 86.106,85.065 ; 85.496,77.953 85.827,77.953 ; 85.496,82.931 85.75,82.931 ; 85.496,83.363 85.75,83.363 ; 85.496,85.039 86.512,85.039 ; 85.522,79.578 86.258,79.578 ; 85.522,82.956 85.75,82.956 ; 85.522,83.337 85.776,83.337 ; 85.522,84.988 86.538,84.988 ; 85.522,85.014 86.538,85.014 ; 85.547,77.978 85.877,77.978 ; 85.547,79.553 86.309,79.553 ; 85.547,82.982 85.776,82.982 ; 85.547,83.007 85.776,83.007 ; 85.547,83.312 85.776,83.312 ; 85.547,84.963 86.563,84.963 ; 85.573,83.033 85.801,83.033 ; 85.573,83.261 85.801,83.261 ; 85.573,83.287 85.776,83.287 ; 85.573,84.938 86.563,84.938 ; 85.598,78.003 85.903,78.003 ; 85.598,79.527 86.335,79.527 ; 85.598,80.162 85.877,80.162 ; 85.598,80.188 85.877,80.188 ; 85.598,80.213 85.877,80.213 ; 85.598,80.239 85.852,80.239 ; 85.598,80.264 85.852,80.264 ; 85.598,80.289 85.852,80.289 ; 85.598,80.315 85.852,80.315 ; 85.598,80.34 85.852,80.34 ; 85.598,80.366 85.852,80.366 ; 85.598,80.391 85.852,80.391 ; 85.598,80.416 85.852,80.416 ; 85.598,80.442 85.852,80.442 ; 85.598,80.467 85.852,80.467 ; 85.598,83.058 85.801,83.058 ; 85.598,83.083 85.801,83.083 ; 85.598,83.109 85.801,83.109 ; 85.598,83.134 85.801,83.134 ; 85.598,83.16 85.801,83.16 ; 85.598,83.185 85.801,83.185 ; 85.598,83.21 85.801,83.21 ; 85.598,83.236 85.801,83.236 ; 85.598,84.887 86.589,84.887 ; 85.598,84.912 86.589,84.912 ; 85.623,78.029 85.928,78.029 ; 85.623,79.502 85.852,79.502 ; 85.623,80.01 85.928,80.01 ; 85.623,80.035 85.903,80.035 ; 85.623,80.061 85.903,80.061 ; 85.623,80.086 85.903,80.086 ; 85.623,80.112 85.877,80.112 ; 85.623,80.137 85.877,80.137 ; 85.623,80.493 85.877,80.493 ; 85.623,80.518 85.877,80.518 ; 85.623,80.543 85.877,80.543 ; 85.623,80.569 85.877,80.569 ; 85.623,80.594 85.903,80.594 ; 85.623,84.861 86.614,84.861 ; 85.649,79.477 85.852,79.477 ; 85.649,80.62 85.903,80.62 ; 85.649,80.645 85.903,80.645 ; 85.649,80.67 85.928,80.67 ; 85.649,84.836 86.614,84.836 ; 85.674,78.054 85.954,78.054 ; 85.674,79.451 85.852,79.451 ; 85.674,80.696 85.928,80.696 ; 85.674,80.721 85.928,80.721 ; 85.674,84.785 86.639,84.785 ; 85.674,84.811 86.614,84.811 ; 85.7,78.08 85.979,78.08 ; 85.7,79.426 85.852,79.426 ; 85.7,80.747 85.954,80.747 ; 85.7,80.772 85.979,80.772 ; 85.7,84.734 86.665,84.734 ; 85.7,84.76 86.639,84.76 ; 85.725,78.105 86.004,78.105 ; 85.725,79.4 85.852,79.4 ; 85.725,80.797 85.979,80.797 ; 85.725,80.823 86.004,80.823 ; 85.725,84.709 86.665,84.709 ; 85.75,78.13 86.03,78.13 ; 85.75,79.375 85.852,79.375 ; 85.75,80.848 86.004,80.848 ; 85.75,80.874 86.03,80.874 ; 85.75,84.658 86.69,84.658 ; 85.75,84.684 86.665,84.684 ; 85.776,78.156 86.03,78.156 ; 85.776,79.35 85.827,79.35 ; 85.776,80.899 86.055,80.899 ; 85.776,80.924 86.081,80.924 ; 85.776,84.607 86.69,84.607 ; 85.776,84.633 86.69,84.633 ; 85.801,78.181 86.055,78.181 ; 85.801,80.95 86.106,80.95 ; 85.801,80.975 86.131,80.975 ; 85.801,84.557 86.716,84.557 ; 85.801,84.582 86.716,84.582 ; 85.827,78.207 86.081,78.207 ; 85.827,81.001 86.157,81.001 ; 85.827,81.026 86.208,81.026 ; 85.827,84.506 86.741,84.506 ; 85.827,84.531 86.716,84.531 ; 85.852,78.232 86.081,78.232 ; 85.852,81.051 86.233,81.051 ; 85.852,84.43 86.766,84.43 ; 85.852,84.455 86.741,84.455 ; 85.852,84.48 86.741,84.48 ; 85.877,78.257 86.106,78.257 ; 85.877,78.283 86.106,78.283 ; 85.877,79.502 86.385,79.502 ; 85.877,81.077 86.284,81.077 ; 85.877,81.102 86.36,81.102 ; 85.877,84.379 86.766,84.379 ; 85.877,84.404 86.766,84.404 ; 85.903,78.308 86.131,78.308 ; 85.903,78.334 86.131,78.334 ; 85.903,79.451 86.512,79.451 ; 85.903,79.477 86.436,79.477 ; 85.903,81.128 86.462,81.128 ; 85.903,81.153 87.3,81.153 ; 85.903,84.277 86.792,84.277 ; 85.903,84.303 86.792,84.303 ; 85.903,84.328 86.792,84.328 ; 85.903,84.353 86.766,84.353 ; 85.928,78.359 86.157,78.359 ; 85.928,79.4 87.249,79.4 ; 85.928,79.426 87.3,79.426 ; 85.928,81.178 87.249,81.178 ; 85.928,81.204 86.995,81.204 ; 85.928,84.201 86.817,84.201 ; 85.928,84.226 86.817,84.226 ; 85.928,84.252 86.817,84.252 ; 85.954,78.384 86.157,78.384 ; 85.954,78.41 86.157,78.41 ; 85.954,78.435 86.182,78.435 ; 85.954,79.324 87.122,79.324 ; 85.954,79.35 87.173,79.35 ; 85.954,79.375 87.224,79.375 ; 85.954,81.229 86.97,81.229 ; 85.954,81.255 86.919,81.255 ; 85.954,84.074 86.868,84.074 ; 85.954,84.099 86.843,84.099 ; 85.954,84.125 86.843,84.125 ; 85.954,84.15 86.843,84.15 ; 85.954,84.176 86.843,84.176 ; 85.979,78.461 86.182,78.461 ; 85.979,78.486 86.208,78.486 ; 85.979,79.248 86.233,79.248 ; 85.979,79.273 86.233,79.273 ; 85.979,79.299 87.046,79.299 ; 85.979,81.28 86.893,81.28 ; 85.979,81.305 86.868,81.305 ; 85.979,81.331 86.843,81.331 ; 85.979,83.947 86.766,83.947 ; 85.979,83.972 86.817,83.972 ; 85.979,83.998 86.843,83.998 ; 85.979,84.023 86.868,84.023 ; 85.979,84.049 86.868,84.049 ; 86.004,78.511 86.208,78.511 ; 86.004,78.537 86.208,78.537 ; 86.004,78.562 86.233,78.562 ; 86.004,79.146 86.233,79.146 ; 86.004,79.172 86.233,79.172 ; 86.004,79.197 86.233,79.197 ; 86.004,79.223 86.233,79.223 ; 86.004,81.356 86.817,81.356 ; 86.004,81.382 86.766,81.382 ; 86.004,83.795 86.589,83.795 ; 86.004,83.82 86.589,83.82 ; 86.004,83.845 86.639,83.845 ; 86.004,83.871 86.665,83.871 ; 86.004,83.896 86.716,83.896 ; 86.004,83.922 86.741,83.922 ; 86.03,78.588 86.233,78.588 ; 86.03,78.613 86.233,78.613 ; 86.03,78.638 86.233,78.638 ; 86.03,78.664 86.233,78.664 ; 86.03,78.689 86.233,78.689 ; 86.03,79.019 86.258,79.019 ; 86.03,79.045 86.258,79.045 ; 86.03,79.07 86.233,79.07 ; 86.03,79.096 86.233,79.096 ; 86.03,79.121 86.233,79.121 ; 86.03,81.407 86.741,81.407 ; 86.03,81.432 86.716,81.432 ; 86.03,81.458 86.69,81.458 ; 86.03,81.483 86.639,81.483 ; 86.03,83.566 86.614,83.566 ; 86.03,83.591 86.614,83.591 ; 86.03,83.617 86.614,83.617 ; 86.03,83.642 86.614,83.642 ; 86.03,83.668 86.589,83.668 ; 86.03,83.693 86.589,83.693 ; 86.03,83.718 86.589,83.718 ; 86.03,83.744 86.589,83.744 ; 86.03,83.769 86.589,83.769 ; 86.055,78.715 86.258,78.715 ; 86.055,78.74 86.258,78.74 ; 86.055,78.765 86.258,78.765 ; 86.055,78.791 86.258,78.791 ; 86.055,78.816 86.258,78.816 ; 86.055,78.842 86.258,78.842 ; 86.055,78.867 86.258,78.867 ; 86.055,78.892 86.258,78.892 ; 86.055,78.918 86.258,78.918 ; 86.055,78.943 86.258,78.943 ; 86.055,78.969 86.258,78.969 ; 86.055,78.994 86.258,78.994 ; 86.055,81.509 86.614,81.509 ; 86.055,81.534 86.589,81.534 ; 86.055,81.559 86.563,81.559 ; 86.055,81.585 86.563,81.585 ; 86.055,83.287 86.868,83.287 ; 86.055,83.312 86.817,83.312 ; 86.055,83.337 86.766,83.337 ; 86.055,83.363 86.741,83.363 ; 86.055,83.388 86.69,83.388 ; 86.055,83.414 86.665,83.414 ; 86.055,83.439 86.639,83.439 ; 86.055,83.464 86.639,83.464 ; 86.055,83.49 86.614,83.49 ; 86.055,83.515 86.614,83.515 ; 86.055,83.541 86.614,83.541 ; 86.081,81.61 86.538,81.61 ; 86.081,81.636 86.512,81.636 ; 86.081,81.661 86.512,81.661 ; 86.081,81.686 86.487,81.686 ; 86.081,81.712 86.487,81.712 ; 86.081,81.737 86.487,81.737 ; 86.081,82.906 86.995,82.906 ; 86.081,82.931 86.995,82.931 ; 86.081,82.956 86.995,82.956 ; 86.081,82.982 86.995,82.982 ; 86.081,83.007 86.995,83.007 ; 86.081,83.033 86.995,83.033 ; 86.081,83.058 86.995,83.058 ; 86.081,83.083 86.995,83.083 ; 86.081,83.109 86.97,83.109 ; 86.081,83.134 86.97,83.134 ; 86.081,83.16 86.97,83.16 ; 86.081,83.185 86.97,83.185 ; 86.081,83.21 86.97,83.21 ; 86.081,83.236 86.97,83.236 ; 86.081,83.261 86.944,83.261 ; 86.106,81.763 86.462,81.763 ; 86.106,81.788 86.462,81.788 ; 86.106,81.813 86.462,81.813 ; 86.106,81.839 86.436,81.839 ; 86.106,81.864 86.436,81.864 ; 86.106,81.89 86.411,81.89 ; 86.106,81.915 86.411,81.915 ; 86.106,81.94 86.411,81.94 ; 86.106,81.966 86.385,81.966 ; 86.106,81.991 86.385,81.991 ; 86.106,82.017 86.36,82.017 ; 86.106,82.677 86.995,82.677 ; 86.106,82.702 86.995,82.702 ; 86.106,82.728 86.995,82.728 ; 86.106,82.753 86.995,82.753 ; 86.106,82.779 86.995,82.779 ; 86.106,82.804 86.995,82.804 ; 86.106,82.829 86.995,82.829 ; 86.106,82.855 86.995,82.855 ; 86.106,82.88 86.995,82.88 ; 86.131,82.042 86.36,82.042 ; 86.131,82.067 86.335,82.067 ; 86.131,82.093 86.335,82.093 ; 86.131,82.118 86.309,82.118 ; 86.131,82.652 86.995,82.652 ; 86.157,82.144 86.284,82.144 ; 86.157,82.626 86.995,82.626 ; 86.182,82.169 86.233,82.169 ; 86.182,82.601 86.97,82.601 ; 86.208,82.575 86.97,82.575 ; 86.233,82.525 86.97,82.525 ; 86.233,82.55 86.97,82.55 ; 86.258,82.499 86.97,82.499 ; 86.284,82.474 86.944,82.474 ; 86.309,79.273 86.97,79.273 ; 86.309,82.448 86.944,82.448 ; 86.335,82.398 86.944,82.398 ; 86.335,82.423 86.944,82.423 ; 86.36,82.372 86.919,82.372 ; 86.385,82.347 86.919,82.347 ; 86.411,79.248 86.843,79.248 ; 86.411,82.296 86.919,82.296 ; 86.411,82.321 86.919,82.321 ; 86.436,82.245 86.893,82.245 ; 86.436,82.271 86.893,82.271 ; 86.462,82.194 86.893,82.194 ; 86.462,82.22 86.893,82.22 ; 86.487,82.144 86.868,82.144 ; 86.487,82.169 86.868,82.169 ; 86.512,82.067 86.843,82.067 ; 86.512,82.093 86.868,82.093 ; 86.512,82.118 86.868,82.118 ; 86.538,82.042 86.843,82.042 ; 86.563,81.991 86.817,81.991 ; 86.563,82.017 86.843,82.017 ; 86.589,81.966 86.817,81.966 ; 86.614,81.915 86.792,81.915 ; 86.614,81.94 86.817,81.94 ; 86.639,81.89 86.792,81.89 ; 86.69,81.864 86.741,81.864 ; 86.792,81.128 87.325,81.128 ; 86.843,79.451 87.325,79.451 ; 86.919,79.477 87.351,79.477 ; 86.919,81.102 87.351,81.102 ; 86.995,79.502 87.376,79.502 ; 86.995,81.077 87.376,81.077 ; 87.046,81.051 87.401,81.051 ; 87.071,79.527 87.401,79.527 ; 87.097,79.553 87.427,79.553 ; 87.097,81.026 87.427,81.026 ; 87.147,79.578 87.452,79.578 ; 87.147,81.001 87.427,81.001 ; 87.147,81.204 87.224,81.204 ; 87.173,79.604 87.478,79.604 ; 87.173,80.975 87.452,80.975 ; 87.224,79.629 87.503,79.629 ; 87.224,80.95 87.478,80.95 ; 87.249,79.654 87.503,79.654 ; 87.249,80.924 87.478,80.924 ; 87.274,79.68 87.528,79.68 ; 87.274,80.899 87.503,80.899 ; 87.3,79.705 87.554,79.705 ; 87.3,79.731 87.554,79.731 ; 87.3,80.848 87.528,80.848 ; 87.3,80.874 87.528,80.874 ; 87.325,79.756 87.579,79.756 ; 87.325,80.823 87.554,80.823 ; 87.351,79.781 87.579,79.781 ; 87.351,80.772 87.579,80.772 ; 87.351,80.797 87.554,80.797 ; 87.376,79.807 87.605,79.807 ; 87.376,79.832 87.605,79.832 ; 87.376,80.747 87.579,80.747 ; 87.401,79.858 87.63,79.858 ; 87.401,79.883 87.63,79.883 ; 87.401,80.696 87.605,80.696 ; 87.401,80.721 87.605,80.721 ; 87.427,79.908 87.63,79.908 ; 87.427,79.934 87.655,79.934 ; 87.427,80.62 87.63,80.62 ; 87.427,80.645 87.63,80.645 ; 87.427,80.67 87.63,80.67 ; 87.452,79.959 87.655,79.959 ; 87.452,79.985 87.655,79.985 ; 87.452,80.01 87.655,80.01 ; 87.452,80.035 87.681,80.035 ; 87.452,80.518 87.655,80.518 ; 87.452,80.543 87.655,80.543 ; 87.452,80.569 87.655,80.569 ; 87.452,80.594 87.655,80.594 ; 87.478,80.061 87.681,80.061 ; 87.478,80.086 87.681,80.086 ; 87.478,80.112 87.681,80.112 ; 87.478,80.137 87.681,80.137 ; 87.478,80.162 87.681,80.162 ; 87.478,80.366 87.681,80.366 ; 87.478,80.391 87.681,80.391 ; 87.478,80.416 87.681,80.416 ; 87.478,80.442 87.681,80.442 ; 87.478,80.467 87.681,80.467 ; 87.478,80.493 87.681,80.493 ; 87.503,80.188 87.681,80.188 ; 87.503,80.213 87.681,80.213 ; 87.503,80.239 87.681,80.239 ; 87.503,80.264 87.681,80.264 ; 87.503,80.289 87.681,80.289 ; 87.503,80.315 87.681,80.315 ; 87.503,80.34 87.681,80.34